# EAGLE board sensor(LF) (EAGLE 7.6.0)
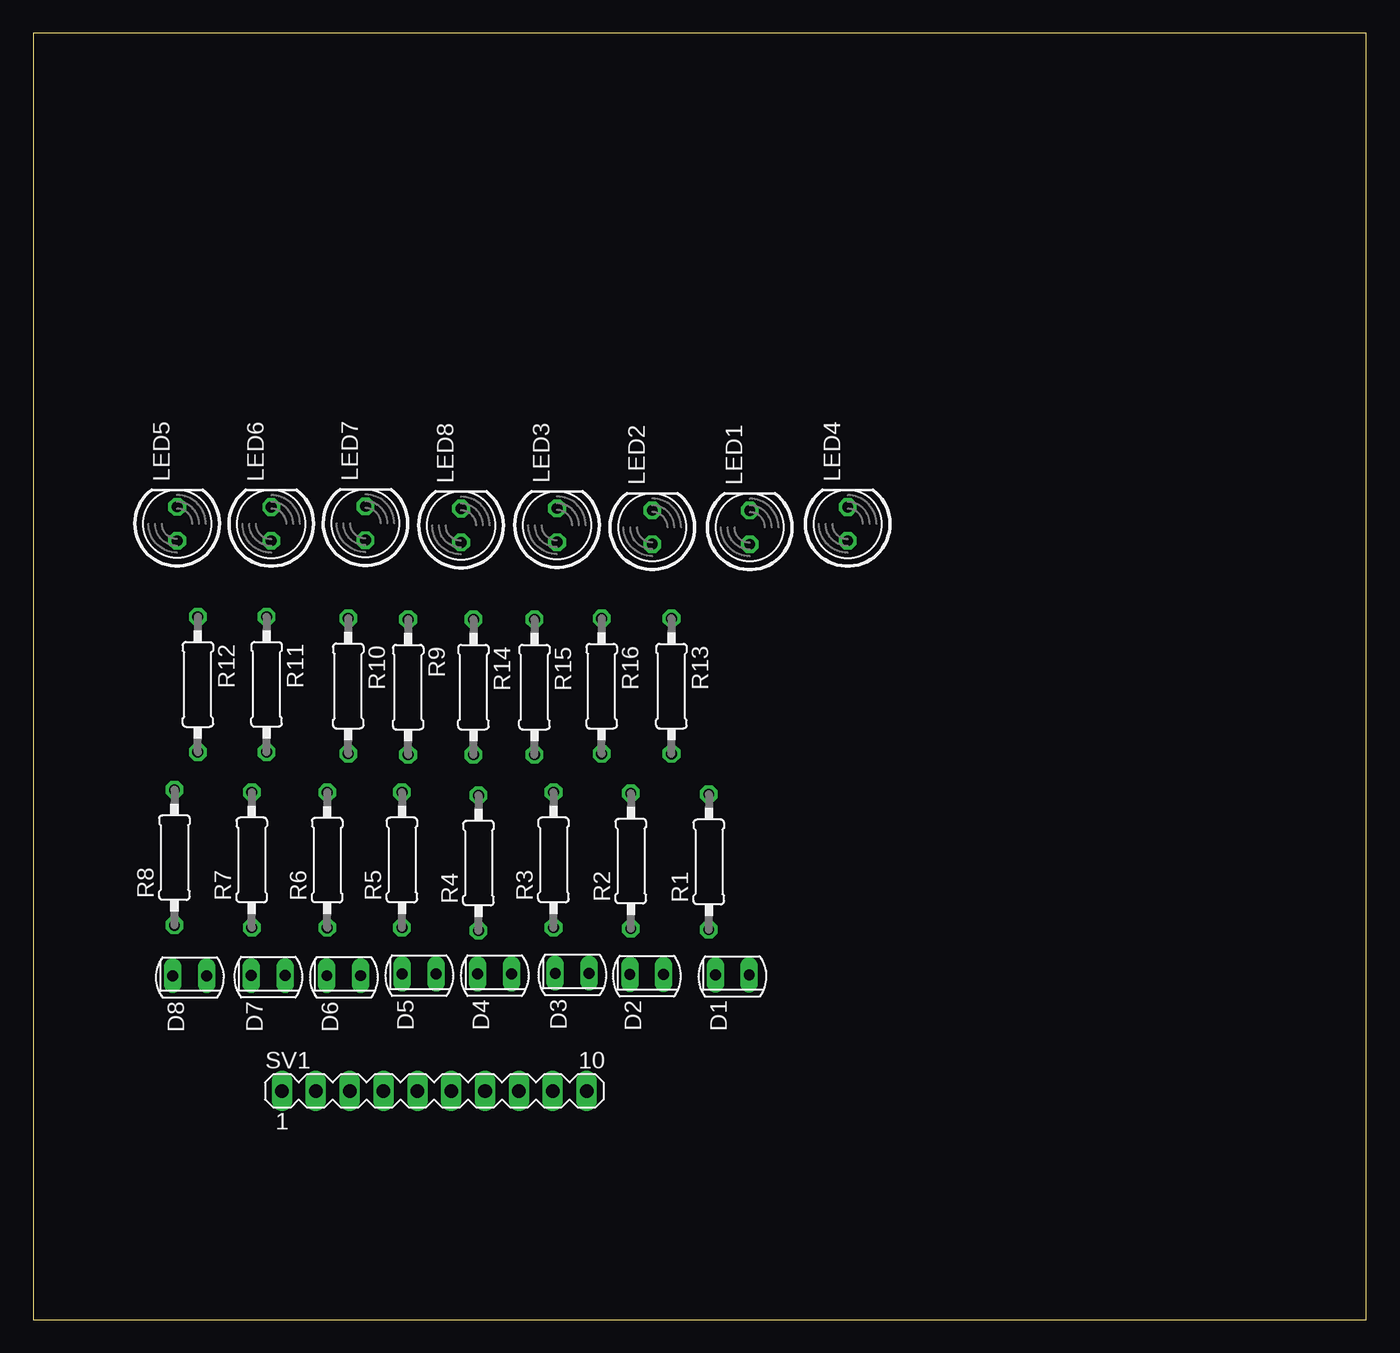
[diagram p0: board, top side]
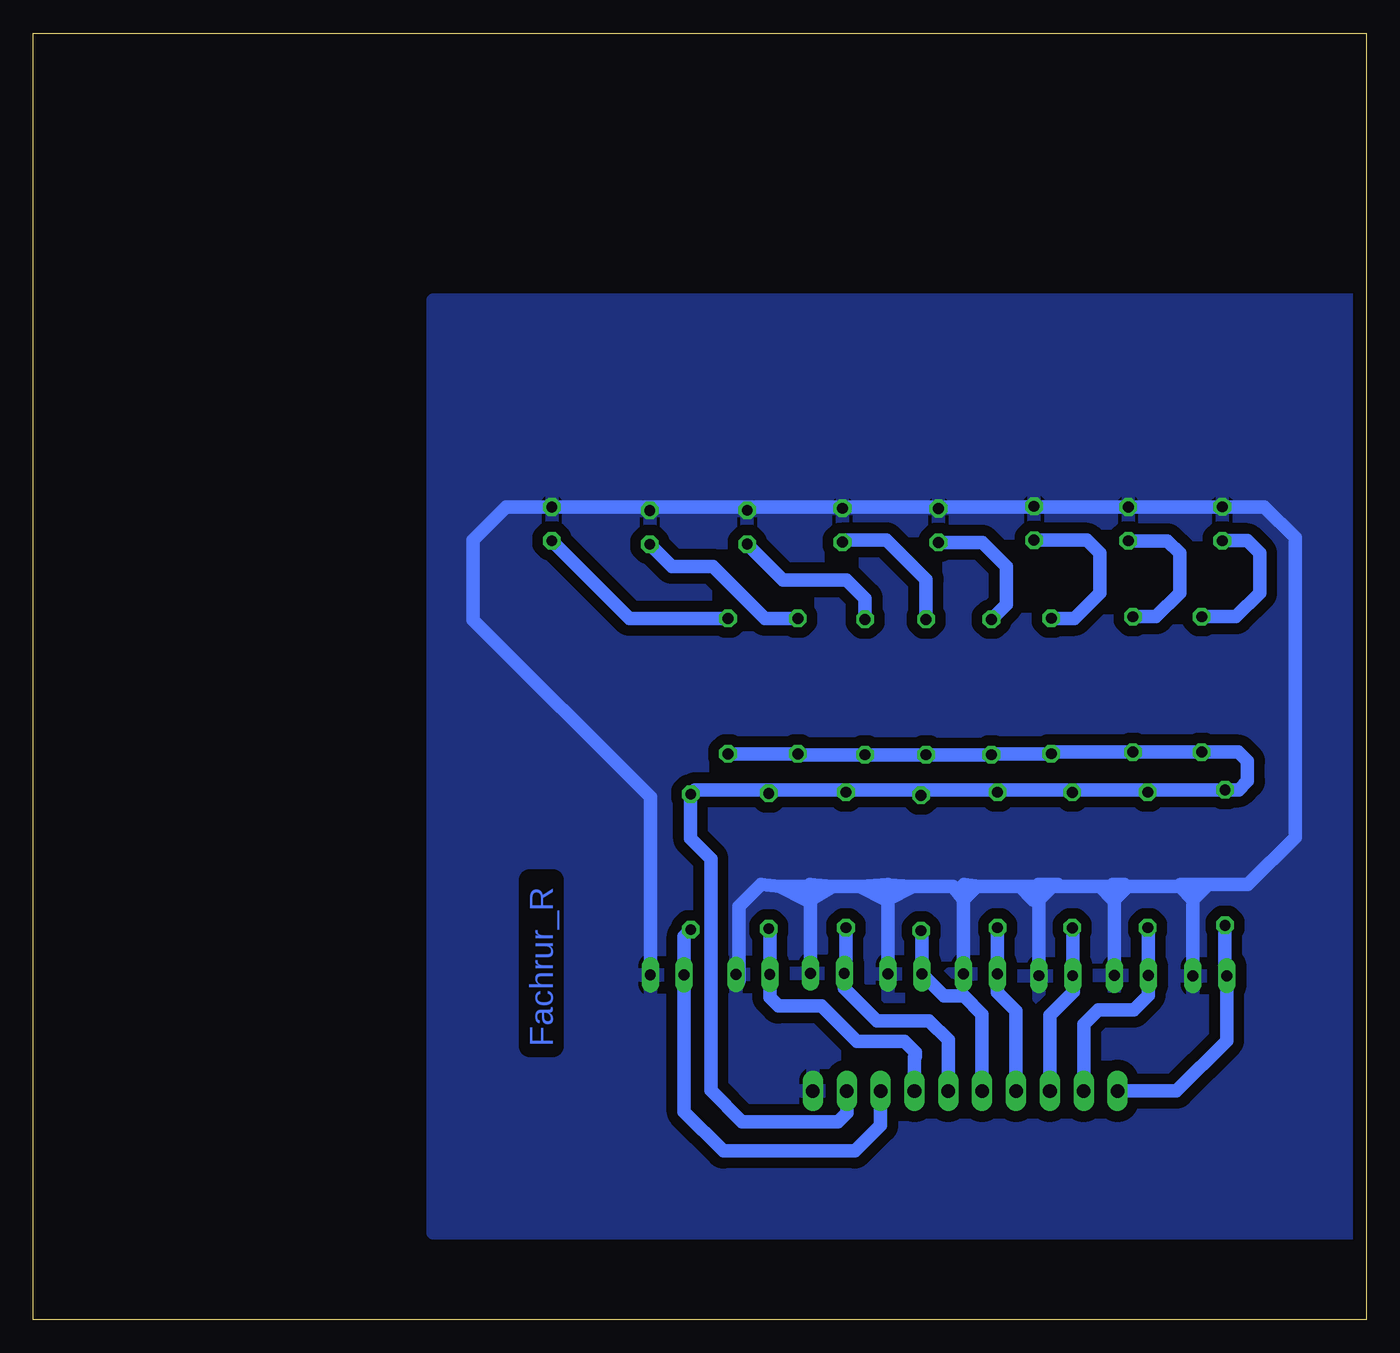
[diagram p1: board, bottom side, seen from below]

Size 100 x 96.51 mm. Coordinates in mm from the lower left corner, seen from the top.
Outline: 0,0 100,0 100,96.51 0,96.51 0,0
Copper layers (1*16): Top 0.035mm / dielectric 1.5mm / Bottom 0.035mm
Design rules "default": minimum track width 6mil, minimum drill 0.35mm, track to track 6mil, track to pad 6mil, pad to pad 6mil, via to via 6mil, smd to smd 6mil, copper to edge 40mil, drill to drill 6mil, minimum pad ring 10mil, minimum via ring 8mil, stop-mask expansion 4mil, vias tented up to drill 0mil, thermal gap 10mil

## Footprints (pad centres in the part's own frame; a part is rotated, then mirrored left to right if it is on the bottom)
SFH225 = drill 0.813 long: A 0,1.27; K 0,-1.27
LED5MM = drill 0.813 octagon: A -1.27,0; K 1.27,0
0207/10 = drill 0.813 octagon: 1 -5.08,0; 2 5.08,0
MA10-1 = drill 1.016 long: 1 -11.43,0; 2 -8.89,0; 3 -6.35,0; 4 -3.81,0; 5 -1.27,0; 6 1.27,0; 7 3.81,0; 8 6.35,0; 9 8.89,0; 10 11.43,0

## Placement (x,y rotation side)
D1  PhotoDioda  [SFH225]  52.44,25.87 270 top
D2  PhotoDioda  [SFH225]  46.02,25.9 270 top
D3  PhotoDioda  [SFH225]  40.43,25.99 270 top
D4  PhotoDioda  [SFH225]  34.61,25.94 270 top
D5  PhotoDioda  [SFH225]  28.95,25.94 270 top
D6  PhotoDioda  [SFH225]  23.29,25.81 270 top
D7  PhotoDioda  [SFH225]  17.62,25.82 270 top
D8  PhotoDioda  [SFH225]  11.73,25.8 270 top
LED1  LED putih SB  [LED5MM]  53.75,59.44 90 top
LED2  LED putih SB  [LED5MM]  46.44,59.45 90 top
LED3  LED putih SB  [LED5MM]  39.29,59.6 90 top
LED4  LED putih SB  [LED5MM]  61.1,59.7 90 top
LED5  LED putih SB  [LED5MM]  10.79,59.71 90 top
LED6  LED putih SB  [LED5MM]  17.85,59.7 90 top
LED7  LED putih SB  [LED5MM]  24.92,59.75 90 top
LED8  LED putih SB  [LED5MM]  32.09,59.58 90 top
R1  [0207/10]  50.68,34.34 90 top
R2  [0207/10]  44.83,34.41 90 top
R3  [0207/10]  39.03,34.49 90 top
R4  [0207/10]  33.4,34.26 90 top
R5  [0207/10]  27.66,34.49 90 top
R6  [0207/10]  22.05,34.48 90 top
R7  [0207/10]  16.39,34.49 90 top
R8  [0207/10]  10.59,34.67 90 top
R9  330  [0207/10]  28.12,47.46 270 top
R10  330  [0207/10]  23.63,47.54 270 top
R11  330  [0207/10]  17.5,47.66 270 top
R12  330  [0207/10]  12.34,47.66 270 top
R13  330  [0207/10]  47.88,47.53 270 top
R14  330  [0207/10]  33.02,47.46 270 top
R15  330  [0207/10]  37.6,47.46 270 top
R16  330  [0207/10]  42.64,47.53 270 top
SV1  [MA10-1]  30.08,17.16 0 top

## Library data of the parts
D1-D8 = opto-trans-siemens
LED1-LED8 = led
R1-R16 = resistor
SV1 = con-lstb

## Nets
GND: D1.A D2.A D3.A D4.A D5.A D6.A D7.A D8.A LED1.K LED2.K LED3.K LED4.K LED5.K LED6.K LED7.K LED8.K SV1.10
N$1: LED7.A R10.1
N$2: D7.K R7.1 SV1.2
N$3: D8.K R8.1 SV1.1
N$4: D1.K R1.1 SV1.8
N$5: D2.K R2.1 SV1.7
N$6: D3.K R3.1 SV1.6
N$7: D5.K R5.1 SV1.4
N$8: D4.K R4.1 SV1.5
N$9: D6.K R6.1 SV1.3
N$10: LED6.A R11.1
N$11: LED5.A R12.1
N$12: LED4.A R13.1
N$13: LED3.A R14.1
N$14: LED2.A R15.1
N$15: LED1.A R16.1
N$16: LED8.A R9.1
VCC: R1.2 R2.2 R3.2 R4.2 R5.2 R6.2 R7.2 R8.2 R9.2 R10.2 R11.2 R12.2 R13.2 R14.2 R15.2 R16.2 SV1.9

## Tracks (layer width: path | path; a pad name or v marks a point on that pad's centre or on a via)
GND
  Bottom 1.016: 12,32.64 8.88,32.64 5.33,36.19 5.33,58.68 7.63,60.98 LED5.K LED4.K 64.54,60.97 67,58.51 67,52.51 53.71,39.22 D1.A | 12,32.64 13.44,32.64 | D2.A 47.29,25.64 47.05,25.4 47.05,30.99 45.4,32.64 44,32.51 | D3.A 41.7,31.51 | 41.7,31.51 41.7,32.62 41.72,32.64 40,32.51 | D4.A 35.88,32.63 | 35.88,32.63 35.89,32.64 38,32.51 | D5.A 30.22,31.51 | 13,32.2 13.44,32.64 | D8.A 13,31.51 | 13,31.51 12,32.51 12,32.64 | D6.A 24.56,31.51 | 24.56,31.51 24.56,32.6 24.6,32.64 23.13,32.64 23,32.51 | D7.A 18.89,31.51 | 18.89,31.51 18.89,32.51 19.02,32.64 18.13,32.64 18,32.51 | 13.44,32.64 13.87,32.64 arc-90 14,32.51 | 13,31.51 14,32.51 | 14,32.51 18,32.51 | 18,32.51 18,32.4 18.89,31.51 | 18,32.51 20,32.51 | 19,31.51 20,32.51 | 20,32.51 23,32.51 | 23,32.51 23.56,32.51 | 23.56,32.51 24.56,31.51 | 23.56,32.51 26,32.51 | 25,31.51 26,32.51 | 26,32.51 29,32.51 | 29,32.51 29.22,32.51 30.22,31.51 | 29,32.51 30.18,32.64 30.22,32.6 30.22,31.51 | 35.88,32.63 34,32.51 36,31.51 | 36,31.51 36,32.51 31,32.51 30.22,31.51 | 36,31.51 38,32.51 | 38,32.51 40,32.51 | 40,32.51 41.7,31.51 | 40,32.51 44,32.51 | 42,31.51 44,32.51
  pour Bottom (isolate 0.813): 0,76.51 0,6.51 70,6.51 70,76.51
N$1
  Bottom 1.016: R10.1 21.89,52.62 20,54.51 20,57.51 20.97,58.48 LED7.A
N$2
  Bottom 1.016: SV1.2 21.19,22.14 20.09,23.24 17.44,23.24 16.35,24.33 D7.K 16.35,29.37 R7.1
N$3
  Bottom 1.016: SV1.1 14.23,17.16 10.46,20.93 D8.K 10.59,25.93 R8.1
N$4
  Bottom 1.016: SV1.8 36.43,14.58 38.36,12.65 48.22,12.65 51.17,15.6 D1.K 51.17,28.77 R1.1
N$5
  Bottom 1.016: SV1.7 33.89,19.7 33.83,19.76 33.83,20.06 34.66,20.89 38.21,20.89 40.86,23.54 44.1,23.54 44.75,24.19 D2.K 44.75,29.25 R2.1
N$6
  Bottom 1.016: SV1.6 31.35,20.98 32.79,22.42 36.72,22.42 39.16,24.86 D3.K 39.03,26.12 R3.1
N$7
  Bottom 1.016: R5.1 27.68,29.39 D5.K 27.68,24.57 26.27,23.16 SV1.4
N$8
  Bottom 1.016: SV1.5 28.81,22.89 30.2,24.28 31.68,24.28 D4.K 33.34,29.12 R4.1
N$9
  Bottom 1.016: SV1.3 23.73,22.85 21.98,24.6 21.98,25.77 D6.K 22.02,29.37 R6.1
N$10
  Bottom 1.016: R11.1 15.77,52.74 14,54.51 14,57.51 14.92,58.43 LED6.A
N$11
  Bottom 1.016: R12.1 9.77,52.74 8,54.51 8,57.51 8.93,58.44 LED5.A
N$12
  Bottom 1.016: R13.1 55.28,52.61 LED4.A
N$13
  Bottom 1.016: R14.1 33.02,55.53 36,58.51 39.11,58.51 LED3.A
N$14
  Bottom 1.016: R15.1 37.6,54.11 39,55.51 43.77,55.51 LED2.A
N$15
  Bottom 1.016: R16.1 45.1,52.61 49,56.51 52.09,56.51 LED1.A
N$16
  Bottom 1.016: R9.1 27,53.66 27,56.51 28.8,58.31 LED8.A
VCC
  Bottom 1.016: SV1.9 38.97,15.53 39.65,14.85 46.83,14.85 49.17,17.19 49.17,34.58 50.68,36.09 R1.2 50.35,39.75 45,39.75 | 16,39.75 R8.2 9.56,39.75 8.91,40.4 8.91,41.91 9.58,42.58 R12.2 R11.2 23.51,42.58 R10.2 28.04,42.46 R9.2 R14.2 R15.2 42.57,42.38 R16.2 R13.2 | 16,39.75 22,39.75 | 22,39.75 28,39.75 | 28,39.75 33,39.75 | 33,39.75 39,39.75 | 39,39.75 45,39.75 | R7.2 16.18,39.57 16,39.75 | R6.2 22.05,39.7 22,39.75 | R5.2 27.82,39.57 28,39.75 | R4.2 33,39.75 | R2.2 44.83,39.58 45,39.75 | R3.2 39.03,39.72 39,39.75

## Text on the board
Bottom: Fachrur_R